# Altium PCB PCB2.PcbDoc (part 2 of 3)
Units mil, origin at the board's own origin, x right, y up, seen from the top; angles counter-clockwise.
Board outline 3877.63 x 3875.01 mil, 2 copper layers (Top Layer, Bottom Layer); 98 components, 72 nets, 361 pads, 109 vias.
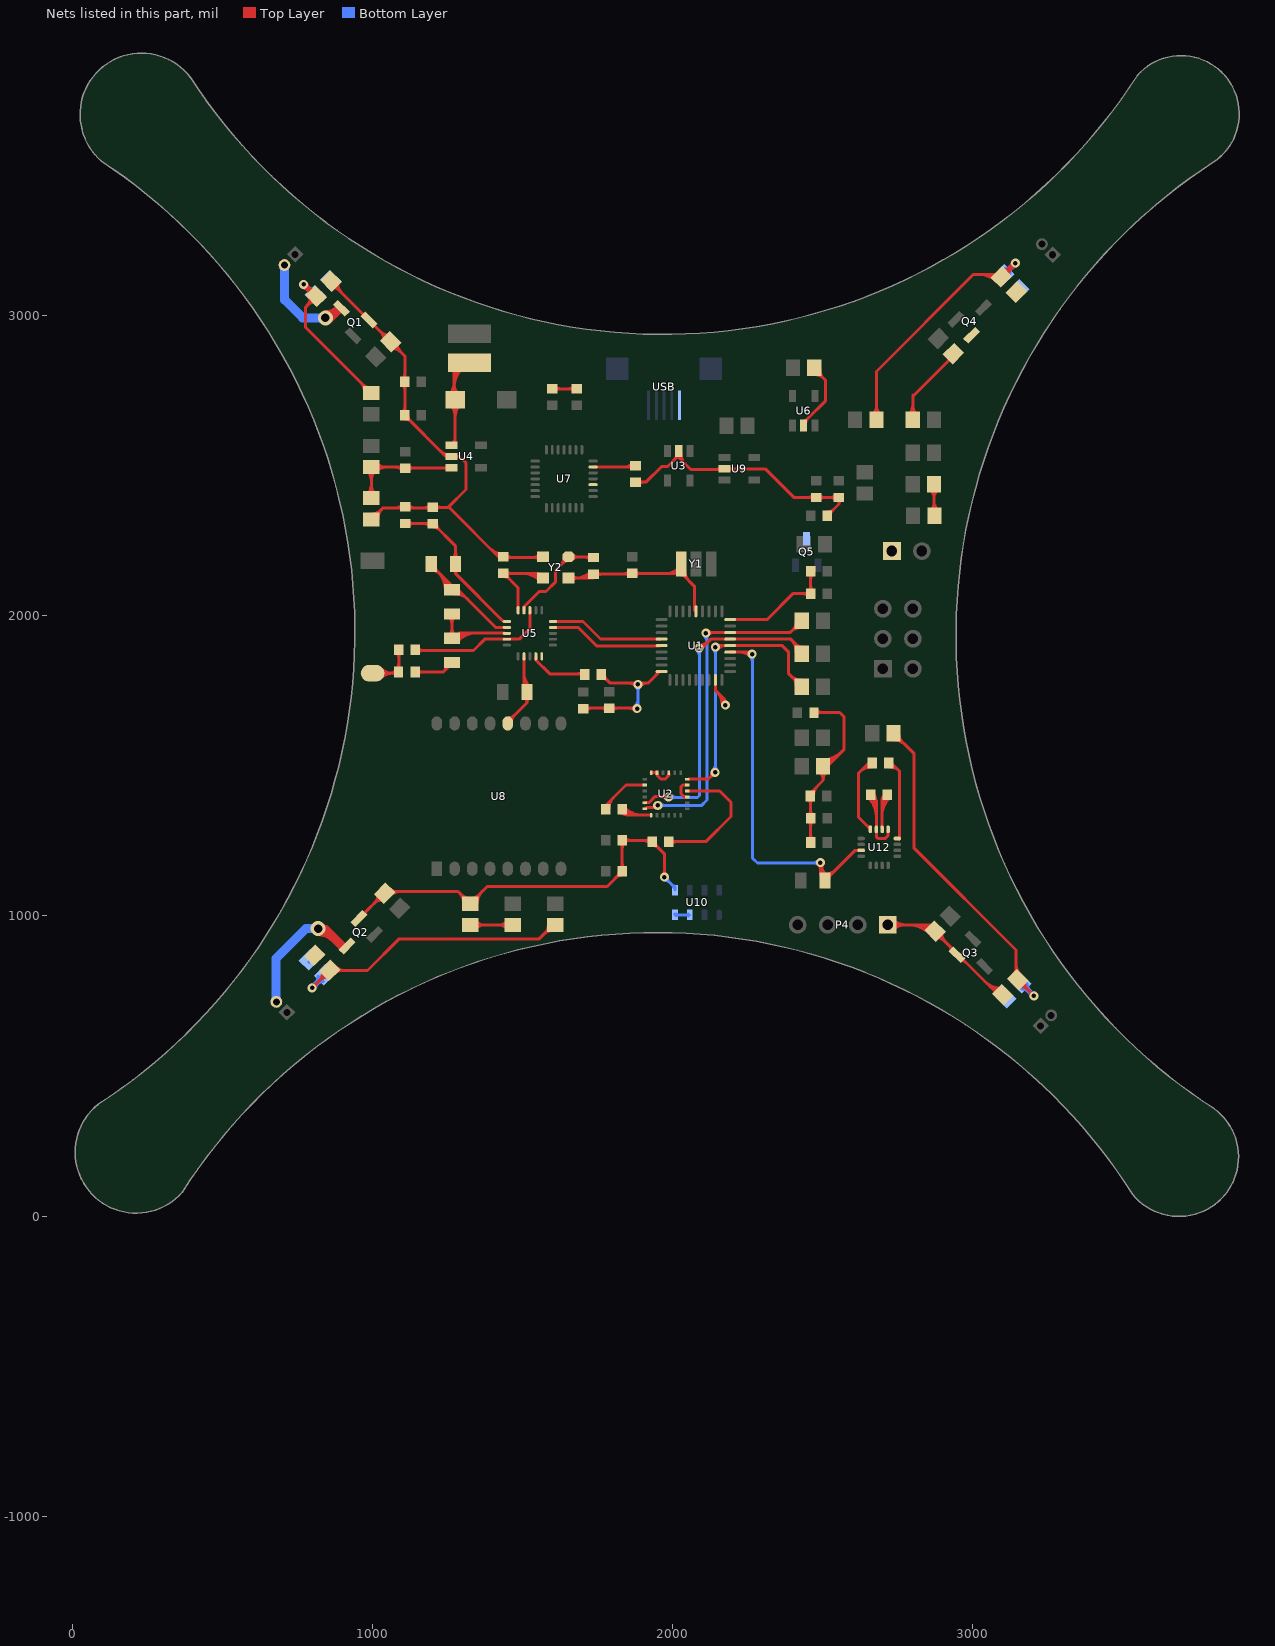
[diagram p2: the nets of this part, all layers, seen from the top]

## Via types
v1: diameter 30, hole 15, Top Layer to Bottom Layer, 92 vias
v2: diameter 50, hole 28, Top Layer to Bottom Layer, 9 vias
v3: diameter 275.59, hole 275.59, Top Layer to Bottom Layer, 4 vias
v4: diameter 90.55, hole 90.55, Top Layer to Bottom Layer, 4 vias

## Nets (pads, with @x,y where several pads share a name; then routed paths per layer and width w, separated by ;. In a path a pad name is that pad's centre, name@x,y a point inside that pad or via, vN(x,y) a via of type N, cw(c..) or ccw(c..) an arc to the next point about the centre after c; other vN are vias at no path point) (continued)
GND: C1.2 C2.1 C3.2 C4.2 C5.2 C6.2 C7.2 C9.2 C10.1 C11.2 C13.1 C14.1 C15.1 C16.1 C17.1 C18.1 C19.1 C20.1 C21.1 C22.2 C23.2 C24.2 C25.1 C26.1 C27.2 C28.2 C29.1 C30.1 D4.2 led1.2 led2.2 led3.2 led4.2 led5.2 led6.2 led7.2 led8.2 P1.1 P4.1 PWR.2 Q1.2 Q2.2 Q3.2 Q4.2 Q5.3 R5.1 R7.1 R8.2 R17.2 R23.2 R24.2 R25.2 R26.2 U1.5 U1.18 U1.26 U1.36 U2.1 U2.9 U2.11 U2.15 U2.17 U2.18 U3.2 U4.2 U5.8 U5.14 U5.17 U5.20 U6.2 U7.3 U8.12 U9.2 U10.3 U10.4 U10.5 U12.9 U12.11 USB.5 Y1.3 Y2.2 Y2.4 | length 13291.6
  Top Layer w10: led2.2@806,873 led2.2@836,873 ; led2.2@806.94,861.94 led2.2@806.94,868.05 ; led1.2@864.81,3092.65 cw(c864.81,3057.55) 889.63,3082.37 ; led1.2@865,3114 865,3107 1107.44,2864.56 C20.1@1107.44,2779 ; led1.2@873.43,3111.27 ccw(c904.11,3111.27) 882.42,3089.58 ; led1.2@883.43,3111.27 ccw(c938.25,3111.27) 899.49,3072.51 ; Q2.2@948,985 949,985 1045,1081 1285.43,1081 D4.2@1326,1040.43 ; 963.17,3008.83 ccw(c976.33,3021.98) Q1.2@976.33,3003.38 ; 965.33,3006.67 cw(c955.23,2996.57) Q1.2@969.52,2996.57 ; Q2.2@966.1,1009.8 ccw(c966.1,1028.4) 979.25,1015.25 ; Q2.2@972.91,1002.99 cw(c987.19,1002.99) 977.09,1013.09 ; R5.1@996,2320.57 1033.43,2358 ; R5.1@999.94,2339.19 ccw(c999.94,2374.64) 1025.01,2349.57 ; Q1.2@999.99,2966.09 cw(c999.99,2951.81) 1010.09,2961.91 ; 1003.85,1039.85 cw(c1037.16,1006.54) R24.2@1037.16,1053.65 ; 1006,1042 ccw(c975.73,1072.27) R24.2@1018.54,1072.27 ; Q1.2@1006.8,2972.9 ccw(c1025.4,2972.9) 1012.25,2959.75 ; R5.1@1008.56,2320.75 cw(c1036.93,2321.36) R5.1@1016.86,2341.43 ; R5.1@1018.56,2320.97 cw(c1069.37,2322.06) 1033.43,2358 ; 1025.29,2946.71 ccw(c1057.27,2978.68) R23.2@1057.27,2933.46 ; 1025.56,2946.44 cw(c993.96,2914.84) R23.2@1038.65,2914.84 ; R24.2@1048.82,1071.74 cw(c1071.18,1049.39) R24.2@1071.18,1081 ; R24.2@1055.9,1064.67 cw(c1095.32,1025.25) 1095.32,1081 ; R24.2@1055.9,1091.01 ccw(c1080.05,1115.16) 1080.05,1081 ; R23.2@1062.84,2890.65 cw(c1062.84,2845.96) 1094.44,2877.56 ; 1072.06,2358 ccw(c1072.06,2397.28) C15.1@1099.84,2369.51 ; R23.2@1081.46,2909.27 ccw(c1126.68,2909.27) 1094.71,2877.29 ; 1090.92,2358 cw(c1090.92,2345.39) C15.1@1099.84,2354.31 ; C21.1@1099.84,2676.57 ccw(c1081.49,2694.92) 1107.44,2694.92 ccw(c1133.39,2694.92) C21.1@1115.04,2676.57 ; C20.1@1099.84,2769.43 cw(c1081.5,2751.09) 1107.44,2751.09 cw(c1133.4,2751.08) C20.1@1115.04,2769.43 ; C20.1@1099.84,2788.57 ccw(c1081.49,2806.92) 1107.44,2806.92 ccw(c1133.39,2806.92) C20.1@1115.04,2788.57 ; C20.1@1107,2779 1107.44,2778.56 C21.1@1107.44,2667 1242.44,2532 ; C21.1@1107.44,2654.28 cw(c1107.44,2623.58) 1129.15,2645.29 ; C21.1@1118.19,2665.03 ccw(c1139.38,2665.03) 1124.4,2650.04 ; C15.1@1118.98,2354.31 cw(c1127.9,2345.39) 1127.9,2358 ; C15.1@1118.98,2369.51 ccw(c1146.76,2397.28) 1146.76,2358 ; C13.1@1142,1884 1336,1884 1373.32,1921.32 U5.14@1443.49,1921.32 ; C13.1@1150.16,1876.43 cw(c1168.43,1858.16) 1168.43,1884 ; C13.1@1150.16,1891.63 ccw(c1168.58,1910.06) 1168.58,1884 ; 1166.91,2358 ccw(c1166.91,2392.68) C14.1@1191.43,2368.16 ; 1179.26,2358 cw(c1179.26,2340.79) C14.1@1191.43,2352.96 ; C14.1@1201,2360.56 1254.44,2360.56 1428,2187 1434,2193 Y2.2@1569,2193 ; C14.1@1202,2358 1033.43,2358 ; C14.1@1210.57,2352.96 cw(c1228.92,2334.61) 1228.92,2360.56 cw(c1228.92,2386.51) C14.1@1210.57,2368.16 ; 1225.56,2548.88 ccw(c1254.7,2578.03) U4.2@1254.7,2536.81 ; 1242.63,2531.81 ccw(c1254.7,2543.89) U4.2@1254.7,2526.81 ; U4.2@1248.25,2527.83 ccw(c1242.44,2525.87) 1242.44,2532 ; 1252,2361 1311,2420 1311,2509 1290,2530 U4.2@1262.58,2530 ; U4.2@1256,2532 1242.44,2532 ; U4.2@1275.27,2525.18 cw(c1286.89,2513.56) 1286.89,2530 cw(c1286.89,2546.44) U4.2@1275.27,2534.82 ; 1287.49,1078.94 cw(c1248.98,1040.43) D4.2@1303.44,1040.43 ; 1296.99,1069.44 ccw(c1322.06,1094.51) D4.2@1322.06,1059.06 ; D4.2@1304.56,1061.87 cw(c1283.12,1040.43) D4.2@1313.44,1040.43 ; D4.2@1329.93,1059.06 ccw(c1329.93,1090.73) 1352.33,1068.33 ; D4.2@1336,1052 1382,1098 1781.56,1098 C5.2@1831.56,1148 ; D4.2@1338.56,1040.43 cw(c1372.65,1040.43) 1348.54,1064.54 ; D4.2@1348.56,1040.43 cw(c1406.8,1040.43) 1365.61,1081.61 ; 1391.48,2223.52 ccw(c1433.03,2265.07) C9.2@1433.03,2206.31 ; 1408.55,2206.45 ccw(c1433.03,2230.93) C9.2@1433.03,2196.31 ; C9.2@1444.57,2187.96 cw(c1456.74,2175.79) 1456.74,2193 ; C9.2@1444.57,2203.16 ccw(c1469.1,2227.69) 1469.1,2193 ; U8.12@1447,1642 1514.35,1709.35 ; U5.14@1447.42,1921.32 1488.32,1921.32 1524,1957 U5.8@1524,2013 ; U8.12@1450.47,1659.57 ccw(c1450.47,1693.62) 1474.55,1669.55 ; U8.12@1463.19,1646.86 cw(c1490.54,1646.86) 1471.2,1666.2 ; R8.2@1504.51,1763.49 U5.17@1504.51,1860.29 ; 1504.51,1785.57 ccw(c1547.05,1785.57) R8.2@1516.97,1755.49 ; 1504.51,1809.71 ccw(c1571.19,1809.71) R8.2@1524.04,1762.56 ; R8.2@1506.02,1726.25 cw(c1493.06,1709.36) 1514.35,1709.36 ; R8.2@1514.35,1745 1514.35,1709.35 ; R8.2@1522.69,1726.25 ccw(c1535.65,1709.36) 1514.35,1709.36 ; 1529.31,2193 ccw(c1529.31,2232.22) Y2.2@1557.04,2204.49 ; 1541.36,2193 cw(c1541.36,2170.82) Y2.2@1557.04,2186.5 ; C23.2@1600.42,2755.42 C22.2@1680,2755.42 ; C23.2@1608.57,2747.82 cw(c1626.92,2729.47) 1626.92,2755.42 cw(c1626.92,2781.37) C23.2@1608.57,2763.02 ; Y2.4@1653,2125.5 C10.1@1736,2125.5 ; Y2.4@1663.96,2116.5 cw(c1685.67,2094.8) 1685.67,2125.5 cw(c1685.67,2156.2) Y2.4@1663.96,2134.49 ; C22.2@1670.43,2747.82 ccw(c1652.08,2729.47) 1652.08,2755.42 ccw(c1652.08,2781.37) C22.2@1670.43,2763.02 ; 1676.83,2125.5 ccw(c1676.83,2195.64) C10.1@1726.43,2146.04 ; C19.1@1692.44,1692 C18.1@1804,1692 ; 1700.97,2125.5 ccw(c1700.97,2171.5) C10.1@1733.5,2138.97 ; C19.1@1711.57,1682.84 cw(c1733.68,1660.73) 1733.68,1692 ; C19.1@1711.57,1698.04 ccw(c1726.16,1712.63) 1726.16,1692 ; C10.1@1735,2138 C11.2@1861,2138 ; C10.1@1745.57,2130.84 cw(c1762.85,2113.56) 1762.85,2138 ; C10.1@1745.57,2146.04 ccw(c1764.98,2165.46) 1764.98,2138 ; 1759.74,1692 cw(c1759.74,1664.15) C18.1@1779.43,1683.84 ; 1762.43,1692 ccw(c1762.43,1716.04) C18.1@1779.43,1699.04 ; C16.1@1762.56,1791.28 cw(c1762.56,1760.58) 1784.27,1782.29 ; C16.1@1762.56,1804 1790.56,1776 1919,1776 ; C16.1@1764,1808 C16.1@1769.39,1813.39 ; C16.1@1773.31,1802.03 ccw(c1794.5,1802.03) 1779.51,1787.04 ; C18.1@1789,1691.44 1879.56,1691.44 v1(1881,1690) 1881,1686 v1@1884,1683 ; C18.1@1798.57,1683.84 cw(c1816.92,1665.49) 1816.92,1691.44 cw(c1816.92,1717.39) C18.1@1798.57,1699.04 ; 1809.85,1126.29 cw(c1831.56,1104.58) C5.2@1831.56,1135.28 ; 1814.6,1131.04 ccw(c1799.62,1146.03) C5.2@1820.81,1146.03 ; C5.2@1823.96,1157.57 ccw(c1805.61,1175.92) 1831.56,1175.92 ccw(c1857.51,1175.92) C5.2@1839.16,1157.57 ; C1.2@1823.96,1241.93 cw(c1805.61,1223.58) 1831.56,1223.58 cw(c1857.51,1223.58) C1.2@1839.16,1241.93 ; C2.1@1825.02,1346.49 ccw(c1852.75,1374.23) 1852.75,1335 ; 1831.19,2138 ccw(c1831.19,2172.28) C11.2@1855.43,2148.04 ; C2.1@1831.56,1355 1851.56,1335 ; C5.2@1832,1147 1831.56,1147.44 C5.2@1831.56,1148 ; C2.1@1832.09,1353.56 ccw(c1876.9,1398.37) 1876.9,1335 ; C2.1@1832.23,1342.3 cw(c1833.81,1317.25) 1851.56,1335 ; C1.2@1839.16,1243.9 cw(c1857.51,1225.55) 1857.51,1251.5 cw(c1857.51,1277.45) C1.2@1839.16,1259.1 ; C2.1@1839.16,1360.63 ccw(c1901.04,1422.51) 1901.04,1335 ; C2.1@1842.31,1353.03 ccw(c1863.5,1353.03) 1848.51,1338.04 ; 1842.97,2138 cw(c1842.97,2120.38) C11.2@1855.43,2132.84 ; 1847.79,1776 cw(c1847.79,1734.79) v1@1876.93,1763.93 ; 1853.38,1691.44 cw(c1853.38,1662.38) v1@1873.93,1682.93 ; 1860.34,1691.44 ccw(c1860.34,1710.66) v1@1873.93,1697.07 ; C11.2@1865,2140.44 2007.44,2140.44 Y1.3@2025,2158 ; C11.2@1874.57,2132.84 cw(c1892.92,2114.49) 1892.92,2140.44 cw(c1892.92,2166.39) C11.2@1874.57,2148.04 ; C25.1@1876,2444.44 1910.44,2444.44 1963,2497 1983,2497 U3.2@2017,2531 ; v1@1884,1761.56 v1(1884,1771) ; C25.1@1885.57,2436.84 cw(c1903.92,2418.49) 1903.92,2444.44 cw(c1903.92,2470.39) C25.1@1885.57,2452.04 ; v1@1891.24,1764.1 cw(c1919,1737.67) 1919,1776 ; 1899.38,1251.5 cw(c1899.38,1216.91) C3.2@1923.84,1241.37 ; 1911.6,1251.5 ccw(c1911.6,1268.81) C3.2@1923.84,1256.57 ; U2.1@1926,1335 1851.56,1335 ; U2.18@1928,1476.73 1928.27,1477 U2.17@1947,1477 ; C3.2@1929.5,1251.5 C3.2@1928.5,1251.5 ; C3.2@1931.44,1234.28 cw(c1931.44,1203.58) 1953.15,1225.29 ; C3.2@1942.19,1245.03 ccw(c1963.38,1245.03) 1948.4,1230.04 ; 1942.31,1799.31 ccw(c1928.24,1813.39) U1.18@1948.14,1813.39 ; U2.17@1947.21,1473.39 ccw(c1957.96,1473.39) 1950.36,1465.78 ; U2.17@1947.68,1476.73 1947.68,1468.46 1960.14,1456 1975,1456 1987,1468 ; U1.18@1957,1814 1919,1776 ; v1@1964.93,1136.07 ccw(c1945.44,1155.56) 1973,1155.56 ; v1@1973,1130 1973,1205.44 C3.2@1931.44,1247 ; 1973,1150.73 ccw(c1993.73,1150.73) v1@1979.07,1136.07 ; 1978.14,2140.44 ccw(c1978.14,2198.24) Y1.3@2019.01,2157.37 ; 1984.09,1465.09 ccw(c1975.8,1473.39) U2.15@1987.53,1473.39 ; 2002.28,2140.44 ccw(c2002.28,2174.1) Y1.3@2026.08,2150.3 ; 2003.89,2517.89 ccw(c1981.44,2540.34) U3.2@2013.19,2540.34 ; U3.2@2016.01,2534.82 cw(c2010.35,2527) 2020,2527 ; U3.2@2016.81,2540.34 ccw(c2041.31,2540.34) 2023.99,2523.01 ; U3.2@2020,2548.21 2020,2527 ; U3.2@2023.99,2534.82 ccw(c2029.65,2527) 2020,2527 ; U3.2@2026.81,2540.34 ccw(c2075.45,2540.34) 2041.06,2505.94 ; Y1.3@2028,2135.66 cw(c2028,2120.36) Y1.3@2038.82,2131.18 ; Y1.3@2030.72,2148.38 ccw(c2052.67,2148.38) Y1.3@2037.15,2132.85 ; 2034.01,1399.99 ccw(c2044.73,1410.72) U2.9@2044.73,1395.55 ; Y1.3@2034,2139 2034,2136 2072,2098 2072,2019.17 U1.5@2077,2014.17 ; Y1.3@2040.72,2148.38 ccw(c2086.81,2148.38) 2054.22,2115.78 ; U2.9@2045.03,1395.66 cw(c2041.7,1399.7) 2038,1396 2028,1406 2028,1430 2033.39,1435.39 U2.11@2048.08,1435.39 ; 2072,2038.7 ccw(c2084.22,2038.7) U1.5@2076.95,2028.87 ; 2072,2040.82 ccw(c2088.88,2040.82) U1.5@2076.94,2028.88 ; U1.26@2141.96,1785.83 2141.96,1751.04 2173,1720 ; 2143.26,2487 ccw(c2143.26,2510.81) U9.2@2160.1,2493.97 ; 2146.62,1746.38 cw(c2102.23,1702) v1@2165,1702 ; 2163.69,1729.31 cw(c2136.37,1702) v1(2175,1702) ; v1@2168.3,1709.42 ccw(c2158.75,1720) 2173,1720 ; U9.2@2169,2487 2060,2487 2020,2527 ; U9.2@2172.79,2489.16 2307.84,2489.16 2403,2394 C27.2@2470,2394 ; v1@2173,1706 2173,1720 ; v1@2178.85,1711.23 cw(c2182.5,1720) 2173,1720 ; U9.2@2185.48,2484.34 cw(c2197.11,2472.71) 2197.11,2489.16 cw(c2197.11,2505.6) U9.2@2185.48,2493.97 ; U1.36@2191.17,1986.61 2313.61,1986.61 2400,2073 C7.2@2457,2073 ; U6.2@2436,2647.47 ccw(c2436,2660.69) U6.2@2445.34,2651.34 ; U6.2@2438,2637 2438,2644 2450.59,2656.59 2450.59,2657.03 2508,2714.44 2508,2785 R7.1@2468.5,2824.5 ; U6.2@2442.81,2640.66 cw(c2462.48,2640.66) 2448.57,2654.57 ; 2448.73,2394 cw(c2448.73,2366.14) C27.2@2468.43,2385.84 ; C4.2@2450.84,1389.43 cw(c2432.49,1371.08) 2458.44,1371.08 cw(c2484.39,1371.08) C4.2@2466.04,1389.43 ; 2451.44,2394 ccw(c2451.44,2418.04) C27.2@2468.43,2401.04 ; C26.1@2451.84,1253.57 ccw(c2435.91,1269.5) 2458.44,1269.5 ; C29.1@2451.84,1315.43 cw(c2435.91,1299.5) 2458.44,1299.5 ; C29.1@2451.84,1334.57 ccw(c2435.91,1350.5) 2458.44,1350.5 ; C7.2@2451.84,2065.4 ccw(c2433.49,2047.05) 2433.49,2073 ccw(c2433.49,2098.95) C7.2@2451.84,2080.6 ; C7.2@2451.84,2082.57 ccw(c2433.49,2100.92) 2459.44,2100.92 ccw(c2485.39,2100.92) C7.2@2467.04,2082.57 ; C6.2@2451.84,2138.43 cw(c2433.49,2120.08) 2459.44,2120.08 cw(c2485.39,2120.08) C6.2@2467.04,2138.43 ; C4.2@2457,1407 2500.78,1450.78 ; C26.1@2458.44,1251.44 C4.2@2458.44,1399 ; 2458.44,1274.33 ccw(c2487.8,1274.33) C26.1@2467.04,1253.57 ; 2458.44,1294.66 cw(c2487.81,1294.66) C29.1@2467.04,1315.43 ; 2458.44,1355.34 ccw(c2487.81,1355.34) C29.1@2467.04,1334.57 ; C7.2@2459.44,2078.56 C6.2@2459.44,2148 ; C4.2@2469.19,1400.97 cw(c2513.17,1400.97) 2482.07,1432.07 ; C24.2@2470.56,1676 2471.56,1677 2556,1677 2571,1662 2571,1555 R17.2@2516,1500 ; R7.1@2471.43,2802.44 cw(c2471.43,2756.27) 2504.08,2788.92 ; C27.2@2478,2393.44 C28.2@2553,2393.44 2554.44,2393.44 2554,2393 2554,2372 ; C24.2@2478.16,1670.37 cw(c2494.17,1654.36) 2494.17,1677 ; C24.2@2478.16,1685.57 ccw(c2498.85,1706.25) 2498.85,1677 ; C27.2@2487.57,2385.84 cw(c2505.92,2367.49) 2505.92,2393.44 cw(c2505.92,2419.39) C27.2@2487.57,2401.04 ; R17.2@2487.98,1480.54 cw(c2459.8,1450.78) 2500.78,1450.78 ; R7.1@2490.06,2821.06 ccw(c2533.8,2821.06) 2502.87,2790.13 ; R17.2@2500.78,1498 2500.78,1450.78 ; R17.2@2500.78,1500.56 ccw(c2500.78,1538.65) 2527.72,1511.72 ; R17.2@2500.78,1510.56 ccw(c2500.78,1572.8) 2544.79,1528.79 ; R17.2@2500.78,1520.56 ccw(c2500.78,1606.94) 2561.86,1545.86 ; R17.2@2513.58,1480.54 ccw(c2541.76,1450.78) 2500.78,1450.78 ; C17.1@2514.56,2345.72 ccw(c2514.56,2377.48) 2537.02,2355.02 ; C17.1@2518,2336 2554,2372 ; C17.1@2525.31,2334.97 cw(c2545.44,2334.97) 2531.2,2349.2 ; C28.2@2543.43,2385.84 ccw(c2525.08,2367.49) 2525.08,2393.44 ccw(c2525.08,2419.39) C28.2@2543.43,2401.04 ; C28.2@2547.92,2385.33 cw(c2536.31,2371.98) 2554,2371.98 ; C28.2@2560.78,2384.4 ccw(c2568.77,2371.98) 2554,2371.98 ; C30.1@2651.84,1393.43 cw(c2588.68,1330.28) 2678,1330.28 ; C30.1@2658.91,1400.5 cw(c2612.83,1354.42) 2678,1354.42 ; C30.1@2659.44,1403 2678,1384.44 ; C30.1@2660.76,1390.37 cw(c2663.32,1369.76) 2678,1384.44 ; C30.1@2665.98,1407.57 cw(c2636.97,1378.56) 2678,1378.56 ; C30.1@2670.19,1401.03 ccw(c2691.38,1401.03) 2676.4,1386.04 ; U12.11@2677.92,1288.04 2677.92,1263.08 2683,1258 2708,1258 2717,1267 2717,1286 U12.9@2718,1287 ; U12.11@2678,1297 2678,1384.44 ; P4.1@2716,970 2851,970 ; P4.1@2726.27,959.73 cw(c2751.07,934.93) 2751.07,970 cw(c2751.07,1005.07) P4.1@2726.27,980.27 ; P4.1@2733.34,952.66 cw(c2775.21,910.79) 2775.21,970 cw(c2775.21,1029.21) P4.1@2733.34,987.34 ; 2782.09,970 cw(c2782.09,862.66) R26.2@2857.99,938.56 ; PWR.2@2786.4,2670.1 ccw(c2754.61,2701.89) 2799.57,2701.89 ccw(c2844.52,2701.89) PWR.2@2812.73,2670.1 ; PWR.2@2799.57,2653 2799.57,2730 ; 2799.57,2735.57 2799.57,2730 ; 2806.23,970 cw(c2806.23,886.8) R26.2@2865.07,945.63 ; 2830.38,970 cw(c2830.38,910.94) R26.2@2872.14,952.7 ; R26.2@2853.65,958.07 ccw(c2842.95,961.95) 2851,970 ; 2854.52,970 cw(c2854.52,935.08) R26.2@2879.21,959.77 ; R26.2@2862.54,968.23 cw(c2857.97,976.97) 2851,970 ; R26.2@2876.73,927.54 cw(c2876.73,887.14) 2905.29,915.71 ; R26.2@2885.35,946.16 ccw(c2910.73,946.16) 2892.78,928.22 ; R26.2@2895.35,946.16 ccw(c2944.87,946.16) 2909.86,911.14 ; R25.2@2920,2860 2920,2850.43 2799.57,2730 ; 2920.63,900.37 cw(c2902.36,882.1) Q3.2@2928.2,882.1 ; Q3.2@2958.67,851.62 cw(c2958.67,825.78) 2976.95,844.05 ; 3038.95,782.05 ccw(c3096.16,839.25) led3.2@3096.16,758.35 ; 3056.03,764.97 ccw(c3096.16,805.11) led3.2@3096.16,748.35 ; led3.2@3073.1,747.9 ccw(c3096.16,770.97) led3.2@3096.16,738.35 ; led3.2@3091,741 3080,741 2851,970 ; led3.2@3109,726.89 led3.2@3109,728 ; led4.2@3142,3078 led4.2@3144,3078 ; C5.2@1831.56,1148 C1.2@1831.56,1251.5 C3.2@1928,1251.5 ; C3.2@1928,1251.5 C3.2@1928.5,1251.5 ; C3.2@1928,1251.5 1928,1250.44 C3.2@1931.44,1247 ; C3.2@1928.5,1251.5 1929,1252 C3.2@1931.44,1247
  Bottom Layer w10: led6.2@789,844 led6.2@789,847 ; led5.2@860.06,3116.05 led5.2@860.06,3118.94 ; v1@1873.93,1697.07 ccw(c1849.62,1721.38) 1884,1721.38 ; v1@1876.93,1763.93 cw(c1859.86,1746.86) 1884,1746.86 cw(c1908.14,1746.86) v1@1891.07,1763.93 ; v1@1881,1693 1884,1696 v1(1884,1771) ; 1884,1706.9 ccw(c1897.9,1706.9) v1@1888.07,1697.07 ; v1@1972,1119 cw(c1972,1094.86) 1989.07,1111.93 cw(c2006.14,1129) v1@1982,1129 ; v1(1972,1129) 2007.36,1093.64 U10.5@2007.36,1085.68 ; U10.5@1999.03,1101.97 cw(c1990.62,1093.55) U10.5@2002.52,1093.55 ; U10.5@1999.24,1101.76 ccw(c2007.36,1109.88) U10.5@2007.36,1098.39 ; U10.4@2006,1006 U10.4@2007.36,1004.64 ; U10.4@2007.36,1003 U10.4@2007.36,1004.64 ; U10.4@2010.79,999.58 cw(c2019.05,991.31) 2019.05,1003 cw(c2019.05,1014.69) U10.4@2010.79,1006.42 ; U10.3@2053.15,999.58 ccw(c2044.88,991.31) 2044.88,1003 ccw(c2044.88,1014.69) U10.3@2053.15,1006.42 ; U10.3@2056.57,1003 2009,1003 U10.4@2007.36,1004.64
HM_INT: R19.1 U1.31 U12.15 | length 1597.7
  Top Layer w10: U1.31@2191.17,1878.35 v1@2262,1878.35 ; 2224.54,1878.35 cw(c2224.54,1832.54) v1@2256.93,1864.93 ; 2248.68,1878.35 cw(c2248.68,1856.68) v1(2264,1872) ; v1@2484.93,1169.93 cw(c2467.86,1152.86) 2492,1152.86 cw(c2516.14,1152.86) v1@2499.07,1169.93 ; v1@2487,1168.34 cw(c2474.93,1147.43) 2498.25,1153.68 cw(c2521.57,1159.93) v1@2500.66,1172 ; R19.1@2492,1140.27 ccw(c2516.63,1140.27) R19.1@2503.27,1119.58 ; 2492,1158.63 ccw(c2528.49,1158.63) R19.1@2508.69,1127.98 ; R19.1@2506.68,1117 2607.68,1218 U12.15@2625,1218 ; R19.1@2506.68,1128.57 ccw(c2506.68,1156.52) 2526.44,1136.76 ; R19.1@2506.68,1138.57 ccw(c2506.68,1190.66) 2543.51,1153.83 ; R19.1@2508,1126 2492,1142 v1(2492,1177) ccw(c2540.35,1177) R19.1@2514.12,1136.38 ; R19.1@2520.38,1124.87 cw(c2534.45,1124.87) R19.1@2524.5,1134.82
  Bottom Layer w10: v1@2256.93,1864.93 cw(c2235.03,1843.03) 2266,1843.03 ; 2266,1852.69 cw(c2283.31,1852.69) v1@2271.07,1864.93 ; v1@2266,1870 2266,1192 2282,1176 2485,1176 v1@2492,1169 ; 2465.44,1176 ccw(c2465.44,1203.56) v1@2484.93,1184.07 ; 2470.27,1176 cw(c2470.27,1155.27) v1@2484.93,1169.93 ; v1@2487,1177 v1(2492,1177) v1@2494,1175
IIC_SCL: R2.2 U1.33 U2.23 | length 1314.7
  Top Layer w10: U2.23@1906.35,1376.34 1906.82,1376.81 1920.81,1376.81 1942,1398 v1@1991,1398 ; 1957.03,1398 cw(c1957.03,1367.03) v1@1978.93,1388.93 ; 1966.69,1398 ccw(c1966.69,1415.31) v1@1978.93,1403.07 ; v1(2087,1892) ccw(c2087,1916.14) 2104.07,1899.07 ; v1@2087,1902 ccw(c2087,1950.28) 2121.14,1916.14 ; v1@2094.5,1884.5 2094.5,1889.5 2126.65,1921.65 U1.33@2191.17,1921.65 2393.35,1921.65 ; 2410.01,1904.99 cw(c2382.77,1877.75) R2.2@2421.29,1877.08 ; R2.2@2411.29,1877.26 ccw(c2350,1878.31) 2393.35,1921.65 ; 2412.04,1902.96 ccw(c2429.91,1920.84) R2.2@2429.91,1895.56 ; R2.2@2424,1891 2393.35,1921.65
  Bottom Layer w10: v1@1993,1394 2082,1394 2089,1401 v1@2089,1892 ; v1@1993.07,1388.93 cw(c2005.31,1376.69) 2005.31,1394 ; v1@1993.07,1403.07 ccw(c2014.97,1424.97) 2014.97,1394 ; v1@2079.93,1884.93 cw(c2058.03,1863.03) 2089,1863.03 ; 2089,1872.69 cw(c2106.31,1872.69) v1@2094.07,1884.93
  other v1: 1986,1396
IIC_SDA: R1.2 U1.34 U2.24 | length 1314.4
  Top Layer w10: U2.24@1909.31,1356.93 cw(c1917,1351.25) 1917,1360.81 v1@1943,1360.81 ; U2.24@1909.36,1356.99 cw(c1918.59,1347.76) 1918.59,1360.81 ; v1(2110,1942) v1@2111,1943 ; v1@2110,1943.31 U1.34@2191.17,1943.31 2390.31,1943.31 R1.2@2427,1980 ; v1@2117.07,1934.93 cw(c2137.3,1914.7) 2137.3,1943.31 ; v1@2117.07,1949.07 ccw(c2130.98,1962.98) 2130.98,1943.31 ; 2391.55,1944.55 cw(c2429.91,1906.19) R1.2@2429.91,1960.44 ; 2400.84,1953.84 ccw(c2375.62,1979.06) R1.2@2411.29,1979.06 ; R1.2@2408.62,1961.62 cw(c2429.91,1940.33) R1.2@2429.91,1970.44
  Bottom Layer w10: v1@1951,1376 1960,1367 2095,1367 2114,1386 v1@2114,1939 ; v1@1957.07,1360.93 cw(c1971.73,1346.27) 1971.73,1367 ; v1@1957.07,1375.07 ccw(c1976.56,1394.56) 1976.56,1367 ; v1@2102.93,1934.93 cw(c2076.2,1908.2) 2114,1908.2 ; 2114,1927.51 cw(c2124.49,1927.51) v1@2117.07,1934.93
  other v1: 1950,1368
MISO: U1.13 U5.5 | length 382
  Top Layer w10: U5.5@1600.97,1980.37 1700.63,1980.37 1759,1922 1954,1922 1956,1920 U1.13@1958,1920
MOSI: U1.14 U5.4 | length 385.2
  Top Layer w10: U5.4@1600.97,1960.68 1685.32,1960.68 1748,1898 U1.14@1955,1898 ; 1943.42,1898 ccw(c1943.42,1904.64) U1.14@1948.12,1899.94
MP_INT: R16.1 U1.32 U2.12 | length 1128.4
  Top Layer w10: U2.12@2053,1456 2119,1456 v1(2141,1478) ; v1@2131,1478 cw(c2106.86,1478) 2123.93,1460.93 cw(c2141,1443.86) v1@2141,1468 ; v1(2142,1895) 2147,1900 U1.32@2191.17,1900 2365,1900 2385,1880 2385,1808 R16.1@2419,1774 ; v1@2149.07,1887.93 cw(c2178.21,1858.79) U1.32@2178.21,1900 ; 2391.55,1801.45 ccw(c2429.91,1839.81) R16.1@2429.91,1785.56 ; 2400.85,1792.15 cw(c2375.63,1766.94) R16.1@2411.29,1766.94 ; R16.1@2408.62,1784.38 ccw(c2429.91,1805.67) R16.1@2429.91,1775.56
  Bottom Layer w10: v1@2133.93,1485.07 ccw(c2114.44,1504.56) 2142,1504.56 ; v1@2134.93,1887.93 cw(c2117.86,1870.86) 2142,1870.86 cw(c2166.14,1870.86) v1@2149.07,1887.93 ; v1(2141,1478) 2142,1479 v1(2142,1895) ; 2142,1499.73 ccw(c2162.73,1499.73) v1@2148.07,1485.07
NetC2_2: C2.2 U2.20 | length 218.4
  Top Layer w10: C2.2@1777,1369 1778,1369 1844.39,1435.39 U2.20@1906.35,1435.39 ; C2.2@1777.19,1356.97 cw(c1804.27,1356.97) 1785.12,1376.12 ; C2.2@1787.19,1356.97 cw(c1838.42,1356.97) 1802.19,1393.19
NetC3_1: C3.1 U2.10 | length 490.1
  Top Layer w10: C3.1@1988,1247 2110,1247 2194,1331 2194,1378 2156.29,1415.71 U2.10@2048.08,1415.71 ; C3.1@1994.16,1239.4 cw(c2012.51,1221.05) 2012.51,1247 cw(c2012.51,1272.95) C3.1@1994.16,1254.6
NetC8_2: C8.2 R4.2 R5.2 U4.3 | length 675.4
  Top Layer w10: R5.2@982.83,2404.6 ccw(c951.04,2436.39) 996,2436.39 ccw(c1040.96,2436.39) R5.2@1009.17,2404.6 ; R4.2@982.83,2481.4 cw(c951.04,2449.61) 996,2449.61 cw(c1040.96,2449.61) R4.2@1009.17,2481.4 ; R5.2@996,2391.43 R4.2@996,2492 ; R4.2@996,2494.57 C8.2@1096.43,2494.57 ; R4.2@1013.11,2481.4 cw(c1044.89,2449.61) 1044.89,2494.57 cw(c1044.89,2539.52) R4.2@1013.11,2507.73 ; 1073.54,2494.57 cw(c1073.54,2457.94) C8.2@1099.43,2483.84 ; 1088.63,2494.57 ccw(c1088.63,2509.84) C8.2@1099.43,2499.04 ; C8.2@1109,2491.44 1263.44,2491.44 U4.3@1264,2492 ; C8.2@1118.57,2483.84 cw(c1136.92,2465.49) 1136.92,2491.44 cw(c1136.92,2517.39) C8.2@1118.57,2499.04 ; 1235.46,2491.44 ccw(c1235.46,2511.84) U4.3@1249.89,2497.41 ; 1241.05,2491.44 cw(c1241.05,2478.95) U4.3@1249.89,2487.78
NetC9_1: C9.1 U5.10 Y2.3 | length 489.9
  Top Layer w10: C9.1@1435,2140.44 1549.56,2140.44 Y2.3@1564,2126 ; C9.1@1436.97,2129.69 cw(c1436.97,2102.32) 1456.32,2121.68 ; C9.1@1438,2140 1484.83,2093.17 U5.10@1484.83,2021.71 ; C9.1@1444.57,2132.84 cw(c1462.92,2114.49) 1462.92,2140.44 cw(c1462.92,2166.39) C9.1@1444.57,2148.04 ; C9.1@1447.72,2140.44 ccw(c1472.24,2140.44) 1454.9,2123.1 ; 1499.25,2140.44 cw(c1499.25,2058.71) Y2.3@1557.04,2116.5 ; 1523.39,2140.44 cw(c1523.39,2082.86) Y2.3@1564.11,2123.58 ; 1547.53,2140.44 cw(c1547.53,2107) Y2.3@1571.18,2130.65
NetC10_2: C10.2 U5.9 Y2.1 | length 462
  Top Layer w10: U5.9@1504.43,2026.63 cw(c1511.08,2026.63) 1506.38,2031.33 ; U5.9@1504.51,2017.77 1504,2018.28 1504,2028.95 1555.05,2080 1578,2080 1609,2111 1609,2150 Y2.1@1648,2189 ; 1626.87,2167.87 ccw(c1599.25,2195.5) Y2.1@1638.32,2195.5 ; 1635.24,2176.24 cw(c1651.03,2160.44) Y2.1@1651.03,2182.78 ; Y2.1@1653,2195.5 C10.2@1728,2195.5 ; Y2.1@1663.96,2186.5 cw(c1685.67,2164.8) 1685.67,2195.5 cw(c1685.67,2226.2) Y2.1@1663.96,2204.49 ; 1703.41,2195.5 cw(c1703.41,2162.94) C10.2@1726.43,2185.96 ; 1712.76,2195.5 ccw(c1712.76,2214.83) C10.2@1726.43,2201.16
NetC12_1: C12.1 C13.2 U11.1 | length 409
  Top Layer w10: U11.1@1000,1808 C12.1@1082,1808 ; U11.1@1020.69,1799.12 cw(c1042.13,1777.68) 1042.13,1808 cw(c1042.13,1838.32) U11.1@1020.69,1816.88 ; U11.1@1027.76,1792.05 cw(c1066.27,1753.54) 1066.27,1808 cw(c1066.27,1862.46) U11.1@1027.76,1823.95 ; 1055.59,1808 ccw(c1055.59,1840.88) C12.1@1078.84,1817.63 ; 1065.4,1808 cw(c1065.4,1788.99) C12.1@1078.84,1802.43 ; C12.1@1078.84,1821.57 ccw(c1058.08,1842.33) 1087.44,1842.33 ; C13.2@1079.84,1876.43 cw(c1061.49,1858.08) 1087.44,1858.08 cw(c1113.39,1858.08) C13.2@1095.04,1876.43 ; C12.1@1087.44,1814.44 C13.2@1087.44,1886 ; 1087.44,1837.51 ccw(c1109.98,1837.51) C12.1@1094.04,1821.57
NetC12_2: C12.2 L2.1 | length 226.7
  Top Layer w10: C12.2@1141.56,1812 1236,1812 ; C12.2@1149.16,1804.4 cw(c1167.51,1786.05) 1167.51,1812 cw(c1167.51,1837.95) C12.2@1149.16,1819.6 ; L2.1@1243.84,1840.32 cw(c1214.93,1833.07) 1236,1812 ; 1248.48,1824.48 ccw(c1234.89,1838.07) L2.1@1253.54,1842.75 ; L2.1@1265,1841 1236,1812
NetC14_2: C14.2 C15.2 L4.1 U5.11 | length 732.7
  Top Layer w10: C15.2@1112,2307 1201,2307 1277,2231 1277,2139 ; C15.2@1118.98,2299.19 cw(c1137.84,2280.32) 1137.84,2307 ; C15.2@1118.98,2314.39 ccw(c1136.81,2332.22) 1136.81,2307 ; 1169.32,2307 cw(c1169.32,2275.73) C14.2@1191.43,2297.84 ; 1176.85,2307 ccw(c1176.85,2327.62) C14.2@1191.43,2313.04 ; C14.2@1202.97,2294.69 cw(c1202.97,2269.73) 1220.62,2287.38 ; C14.2@1213.72,2305.44 ccw(c1240.65,2305.44) 1221.61,2286.39 ; L4.1@1266.67,2189.56 ccw(c1241.72,2214.51) 1277,2214.51 ; L4.1@1269.39,2152.33 cw(c1261.51,2138.99) 1277,2138.99 ; 1277,2211.39 ccw(c1307.87,2211.39) L4.1@1286.04,2189.56 ; L4.1@1284.23,2152.92 ccw(c1294.02,2138.99) 1277,2138.99 ; 1433.69,1982.31 ccw(c1438.57,1987.19) U5.11@1438.57,1980.29 ; U5.11@1443.49,1980.37 1435.63,1980.37 1277,2139
NetC16_2: C16.2 U5.19 | length 239.1
  Top Layer w10: U5.19@1543.8,1855.37 ccw(c1550.45,1855.37) 1545.75,1850.67 ; U5.19@1543.88,1864.23 1544,1864.11 1544,1852.42 1590.42,1806 C16.2@1706,1806 ; 1681.42,1806 cw(c1681.42,1779.94) C16.2@1699.84,1798.37 ; 1681.57,1806 ccw(c1681.57,1831.84) C16.2@1699.84,1813.57
NetC25_2: C25.2 U7.6 | length 165
  Top Layer w10: U7.6@1734.46,2495.06 C25.2@1867.06,2495.06 ; 1837.22,2495.06 ccw(c1837.22,2536.37) C25.2@1866.43,2507.16
NetC30_2: C30.2 U12.10 | length 297.6
  Top Layer w10: U12.10@2697,1292 2697,1385.44 ; 2697,1332.69 cw(c2782.9,1332.69) C30.2@2722.16,1393.43 ; 2697,1356.83 cw(c2758.76,1356.83) C30.2@2715.09,1400.5 ; 2697,1380.97 cw(c2734.62,1380.97) C30.2@2708.02,1407.57 ; 2697.6,1386.04 ccw(c2682.62,1401.03) C30.2@2703.81,1401.03 ; C30.2@2712.74,1390.44 ccw(c2709.7,1372.75) 2697,1385.44 ; C30.2@2714.56,1403 2697,1385.44
NetC31_1: C31.1 U12.8 | length 333.7
  Top Layer w10: C31.1@2719.57,1506.28 cw(c2719.98,1480.38) 2738.3,1498.7 ; C31.1@2719.56,1509 2728,1509 2755,1482 ; C31.1@2719.73,1496.28 cw(c2720.5,1447.51) 2755,1482 ; U12.8@2755,1254.75 2755,1482
NetC31_2: C31.2 U12.12 | length 344.9
  Top Layer w10: 2623.2,1479.2 cw(c2664.44,1437.96) C31.2@2664.44,1496.28 ; 2640.27,1496.27 cw(c2664.44,1472.11) C31.2@2664.44,1506.28 ; 2646.17,1300.83 ccw(c2658.24,1312.9) U12.12@2658.24,1295.83 ; U12.12@2656,1291 2619,1328 2619,1475 2653,1509 C31.2@2664.44,1509
Netchg_2: chg.2 R6.1 | length 244.7
  Top Layer w10: R6.1@2857.26,2420.9 cw(c2825.47,2389.11) 2870.43,2389.11 cw(c2915.39,2389.11) R6.1@2883.6,2420.9 ; chg.2@2858.27,2349.11 ccw(c2828.9,2378.48) 2870.43,2378.48 ; chg.2@2870.43,2334.57 R6.1@2870.43,2438 ; 2870.43,2383.32 ccw(c2918.81,2383.32) chg.2@2884.6,2349.11
NetD1_1: D1.1 L1.2 U4.1 | length 865.7
  Top Layer w10: D1.1@1254.79,2735.65 ccw(c1215.64,2774.79) 1271,2774.79 ; D1.1@1258.72,2702.35 cw(c1218.53,2662.16) 1275.37,2662.16 cw(c1332.21,2662.16) D1.1@1292.02,2702.35 ; D1.1@1261.86,2728.58 ccw(c1239.78,2750.65) 1271,2750.65 ; L1.2@1263.62,2824.73 cw(c1245.81,2806.92) 1271,2806.92 ; U4.1@1265.63,2572.22 ccw(c1242.13,2595.72) 1275.37,2595.72 ; D1.1@1265.79,2709.42 cw(c1242.67,2686.3) 1275.37,2686.3 cw(c1308.07,2686.3) D1.1@1284.95,2709.42 ; U4.1@1270,2572 1275.37,2577.37 D1.1@1275.37,2719 ; D1.1@1271,2723 1271,2828 1308,2865 L1.2@1366,2865 ; 1271,2752.74 ccw(c1305.17,2752.74) D1.1@1281.01,2728.58 ; 1271,2755.44 cw(c1368.99,2755.44) L1.2@1299.7,2824.73 ; 1271,2776.88 ccw(c1329.32,2776.88) D1.1@1288.08,2735.65 ; 1271,2779.58 cw(c1344.85,2779.58) L1.2@1292.63,2831.8 ; 1271,2803.73 cw(c1320.71,2803.73) L1.2@1285.56,2838.87
NetD4_1: D4.1 R3.2 | length 274.7
  Top Layer w10: D4.1@1326,969.57 R3.2@1459.43,969.57 ; D4.1@1343.1,956.4 cw(c1374.89,924.61) 1374.89,969.57 cw(c1374.89,1014.53) D4.1@1343.1,982.74 ; R3.2@1449.9,956.4 ccw(c1418.11,924.61) 1418.11,969.57 ccw(c1418.11,1014.53) R3.2@1449.9,982.74
NetL2_2: L2.2 L3.2 U5.13 | length 539.5
  Top Layer w10: L3.2@1254.31,1995.96 cw(c1230.92,1972.57) 1264,1972.57 cw(c1297.08,1972.57) L3.2@1273.69,1995.96 ; L2.2@1255.31,1934.04 ccw(c1234.34,1955.02) 1264,1955.02 ; 1264,1959.84 ccw(c1300.49,1959.84) L2.2@1274.69,1934.04 ; L3.2@1264,2005.65 1264,1918 1288,1942 U5.13@1439,1942 ; L2.2@1268.42,1928.81 cw(c1300.27,1896.96) 1300.27,1942 ; L2.2@1275.49,1921.74 cw(c1324.41,1872.82) 1324.41,1942 ; L2.2@1282.56,1914.67 cw(c1348.55,1848.68) 1348.55,1942
NetL3_1: L3.1 L4.2 U5.12 | length 612
  Top Layer w10: L4.2@1195.65,2150.43 cw(c1195.65,2107.14) 1226.25,2137.75 ; L4.2@1205,2165 1199,2165 1272,2092 1279,2092 1410.31,1960.69 U5.12@1443.49,1960.69 ; L4.2@1209.35,2164.13 ccw(c1232.22,2164.13) 1216.05,2147.95 ; 1217.52,2146.48 cw(c1157.39,2086.35) L3.1@1242.43,2086.35 ; 1234.59,2129.41 cw(c1191.54,2086.35) L3.1@1252.43,2086.35 ; 1251.66,2112.34 cw(c1225.68,2086.35) L3.1@1262.43,2086.35 ; L3.1@1271.87,2072.65 cw(c1271.87,2008.74) 1317.07,2053.93 ; L3.1@1271.87,2082.65 cw(c1271.87,2042.88) 1299.99,2071.01
Netled1_1: led1.1 led5.1 R10.1 | length 1107
  Top Layer w10: v1@767.41,3093.34 cw(c758.13,3058.71) led1.1@789.18,3076.63 ; v1@770,3093 cw(c770,3068.86) 787.07,3085.93 cw(c804.14,3103) v1@780,3103 ; v1(770,3103) 804,3069 led1.1@804,3068 ; v1@772.45,3100.55 ccw(c809.14,3137.23) led1.1@809.14,3085.35 ; v1@772.59,3093.34 cw(c778.04,3072.98) 788.58,3091.24 ; 778.7,3028.7 ccw(c743.45,3063.95) led1.1@793.3,3063.95 ; v1@779.37,3093.63 cw(c752.48,3066.73) led1.1@790.51,3066.73 ; v1@779.66,3100.41 ccw(c791.66,3097.19) 780.9,3090.98 ; v1@779.66,3105.59 ccw(c805.94,3112.63) 792.34,3089.07 ; 783.59,3033.59 cw(c811.92,3005.26) led1.1@811.92,3045.32 ; 789.52,3083.48 ccw(c809.14,3103.09) led1.1@809.14,3075.35 ; 795.77,3045.77 ccw(c777.59,3063.95) led1.1@803.3,3063.95 ; led1.1@814,3064 776,3026 776,2961.43 R10.1@996,2741.43 ; 957.49,2779.94 cw(c918.98,2741.43) R10.1@973.44,2741.43 ; 966.99,2770.44 ccw(c992.06,2795.51) R10.1@992.06,2760.05 ; R10.1@974.56,2762.87 cw(c953.12,2741.43) R10.1@983.44,2741.43
  Bottom Layer w10: v1@767.93,3093.22 cw(c761.64,3063.45) led5.1@787.99,3078.66 ; v1@770,3093 cw(c770,3061.88) led5.1@792.01,3083.88 ; v1(770,3103) 772.89,3103 led5.1@809.95,3065.95 ; v1@772.59,3093.34 cw(c779.31,3068.25) 792.3,3090.75 ; v1@779.66,3100.41 ccw(c791.72,3097.18) 780.91,3090.93 ; v1@779.66,3105.59 ccw(c801.2,3111.36) 790.05,3092.04 ; v1@780,3103 ccw(c797.16,3103) 785.03,3090.87 ; led5.1@788.54,3068.73 ccw(c743.58,3068.73) 775.37,3100.52 ccw(c807.16,3132.31) led5.1@807.16,3087.35
Netled2_1: led2.1 led6.1 R11.1 | length 1454.3
  Top Layer w10: v1(799,760) 856.95,817.95 led2.1@857.05,817.95 ; v1@799,770 ccw(c799,794.14) 816.07,777.07 ccw(c833.14,760) v1@809,760 ; 822.3,783.3 cw(c854.27,751.32) led2.1@854.27,796.54 ; 822.56,783.56 ccw(c790.95,815.16) led2.1@835.65,815.16 ; led2.1@857,818 983,818 1087,922 1553.19,922 1600.76,969.57 R11.1@1608,969.57 ; led2.1@865.93,826.83 ccw(c887.24,848.14) led2.1@887.24,818 ; led2.1@873.01,807.56 cw(c898.2,782.36) 898.2,818 ; led2.1@873.01,833.9 ccw(c911.39,872.28) 911.39,818 ; 1566.63,935.44 cw(c1604.06,898.01) R11.1@1604.06,950.95 ; 1574.61,943.42 ccw(c1548.46,969.57) R11.1@1585.44,969.57 ; R11.1@1583.7,952.51 cw(c1604.06,932.15) R11.1@1604.06,960.95
  Bottom Layer w10: v1@796.41,769.66 ccw(c788.07,800.78) 815.97,784.67 ; v1(799,760) 801,760 led6.1@838,797 ; v1@799,770 ccw(c799,798.97) 819.49,778.49 ; v1@801.59,769.66 ccw(c805.12,782.85) 811.95,771.02 ; v1@802.73,761.73 ccw(c764.29,800.16) led6.1@818.65,800.16 ; v1@808.66,757.41 cw(c842.11,748.45) 824.79,778.44 ; v1@808.66,762.59 cw(c824.18,766.75) 810.26,774.78 ; v1@809,760 cw(c828.31,760) 814.66,773.66 ; 812.12,771.12 cw(c837.27,745.98) led6.1@837.27,781.54 ; 819.8,778.8 ccw(c798.44,800.16) led6.1@828.65,800.16
Netled3_1: led3.1 led7.1 R12.2 | length 1578.8
  Top Layer w10: R12.2@2735.43,1585.44 cw(c2735.43,1530.98) 2773.94,1569.49 ; R12.2@2735.43,1595.44 cw(c2735.43,1565.12) R12.2@2756.87,1586.56 ; R12.2@2735.43,1608 2804,1539.43 2804,1225 3143,886 led3.1@3143,806 ; R12.2@2754.06,1604.06 ccw(c2789.51,1604.06) 2764.44,1578.99 ; led3.1@3133.1,803.01 ccw(c3109.21,826.9) 3143,826.9 ; led3.1@3143,818.55 ccw(c3174.98,818.55) led3.1@3152.37,795.93 ; 3143,842.69 ccw(c3199.12,842.69) led3.1@3159.44,803.01 ; led3.1@3151.84,765.65 cw(c3151.84,720.69) 3183.63,752.48 cw(c3215.42,784.27) led3.1@3170.46,784.27 ; led3.1@3158,776 3160.11,776 v1(3203,733.11) ; v1@3193,733.11 ccw(c3168.86,733.11) 3185.93,750.18 ccw(c3203,767.25) v1@3203,743.11
  Bottom Layer w10: led7.1@3159.05,777.05 v1(3203,733.11) ; led7.1@3161.84,755.65 cw(c3161.84,710.69) 3193.63,742.48 cw(c3225.42,774.27) led7.1@3180.46,774.27 ; 3176.64,752.29 cw(c3158.71,721.24) v1@3193.34,730.52 ; 3183.82,759.47 ccw(c3214.87,777.4) v1@3205.59,742.77 ; 3190.98,744.01 ccw(c3197.19,754.77) v1@3200.41,742.77 ; 3192.1,745.13 cw(c3181.33,738.91) v1@3193.34,735.7 ; v1@3193,733.11 ccw(c3168.86,733.11) 3185.93,750.18 ccw(c3203,767.25) v1@3203,743.11
Netled4_1: led4.1 led8.1 R13.2 | length 1402.7
  Top Layer w10: R13.2@2665.27,2669.1 ccw(c2633.48,2700.89) 2678.43,2700.89 ccw(c2723.39,2700.89) R13.2@2691.6,2669.1 ; R13.2@2678.43,2652 2678.43,2813.43 3001,3136 3071,3136 led4.1@3088,3119 ; 3021.3,3136 cw(c3021.3,3054.41) led4.1@3078.99,3112.1 ; 3045.44,3136 cw(c3045.44,3078.55) led4.1@3086.07,3119.17 ; led4.1@3069.58,3136 cw(c3069.58,3102.69) led4.1@3093.14,3126.24 ; led4.1@3094.95,3128.05 v1(3141,3174.11) ; led4.1@3097.73,3149.46 ccw(c3097.73,3194.42) 3129.52,3162.63 ccw(c3161.31,3130.84) led4.1@3116.35,3130.84 ; 3113.41,3153.33 ccw(c3094.16,3186.66) v1@3131.34,3176.7 ; 3120.22,3146.52 cw(c3153.55,3127.27) v1@3143.59,3164.45 ; 3127.42,3161.41 ccw(c3123.1,3168.9) v1@3131.4,3171.32 ; 3128.31,3160.53 cw(c3135.79,3156.2) v1@3138.21,3164.51 ; v1@3131,3174.11 cw(c3106.86,3174.11) 3123.93,3157.04 cw(c3141,3139.97) v1@3141,3164.11
  Bottom Layer w10: led8.1@3104.73,3156.46 ccw(c3104.73,3201.42) 3136.52,3169.63 ccw(c3168.31,3137.84) led8.1@3123.35,3137.84 ; led8.1@3111,3143 3111,3144.11 v1(3141,3174.11) ; 3117.48,3158.64 ccw(c3102.61,3184.39) v1@3131.34,3176.7 ; 3124.34,3162.6 cw(c3133.61,3146.54) v1@3138.41,3164.45 ; 3125.53,3150.59 cw(c3151.29,3135.72) v1@3143.59,3164.45 ; 3129.49,3157.45 ccw(c3113.43,3166.72) v1@3131.34,3171.52 ; v1@3131,3174.11 cw(c3106.86,3174.11) 3123.93,3157.04 cw(c3141,3139.97) v1@3141,3164.11
NetP3_2: P3.2 Q1.1 | length 381.2
  Top Layer w30: v2(843,2992) 859,2992 Q1.1@888,3021 ; v2@843,3002 ccw(c843,3064.77) Q1.1@887.38,3020.38
  Bottom Layer w30: P3.2@707,3166 707,3052 767,2992 v2(843,2992)
NetP5_2: P5.2 Q2.1 | length 502.5
  Top Layer w30: v2@819,947 cw(c819,869.75) 873.63,924.37 ; v2@824,954 844,954 ; v2@827.19,962.74 ccw(c844,974.54) 844,954 ; Q2.1@902.5,895.5 844,954
  Bottom Layer w30: P5.2@678,720 678,857 778,957 v2(819,957)